# EAGLE board RFMultiOut (EAGLE 7.3.0)
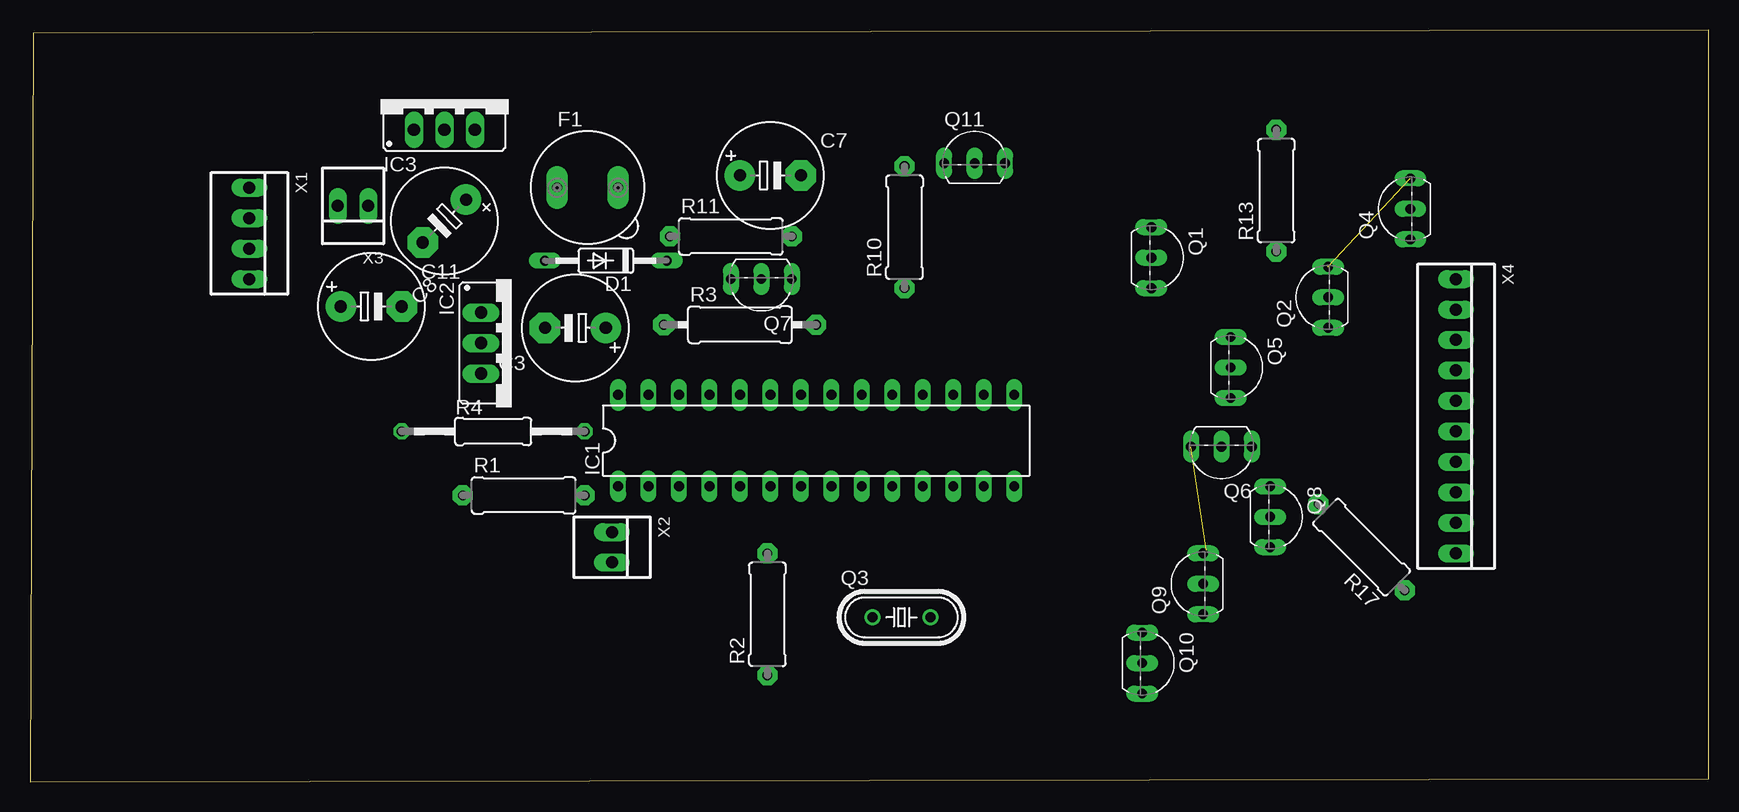
[diagram p0: board, top side]
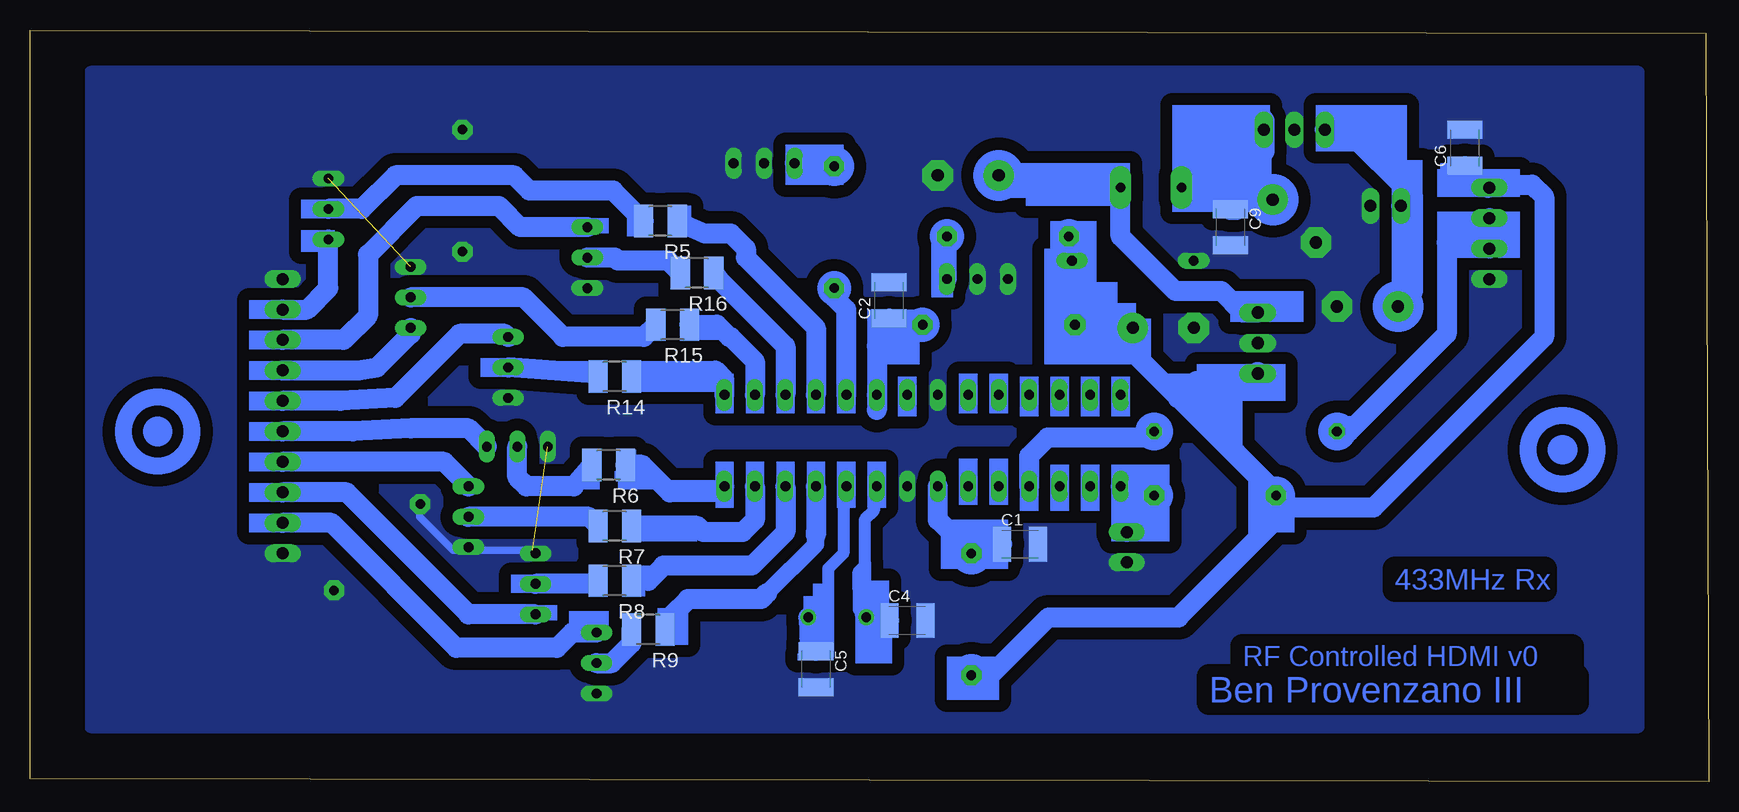
[diagram p1: board, bottom side, seen from below]

Size 139.93 x 62.66 mm. Coordinates in mm from the lower left corner, seen from the top.
Outline: 0,0 139.93,0.25 139.93,62.66 0.25,62.41 0,0
Copper layers (1*16): Top 0.035mm / dielectric 1.5mm / Bottom 0.035mm
Design rules "default": minimum track width 10mil, minimum drill 24mil, track to track 8mil, track to pad 8mil, pad to pad 8mil, via to via 8mil, smd to smd 8mil, copper to edge 40mil, drill to drill 8mil, minimum pad ring 10mil, minimum via ring 8mil, stop-mask expansion 4mil, vias tented up to drill 0mil, thermal gap 10mil

## Footprints (pad centres in the part's own frame; a part is rotated, then mirrored left to right if it is on the bottom)
C1210K = smd 1.5 x 2.9: 1 -1.5,0; 2 1.5,0
E5-8,5 = drill 1.016 pad 2.54: + -2.54,0 | drill 1.016 pad 2.54 octagon: - 2.54,0
DO35-10 = drill 0.813 long: A 5.08,0; C -5.08,0
19560 = drill 0.813 pad 1.778 long: 1 -2.54,0; 2 2.54,0
DIL28-3 = drill 0.813 long: 1 -16.51,-3.81; 2 -13.97,-3.81; 3 -11.43,-3.81; 4 -8.89,-3.81; 5 -6.35,-3.81; 6 -3.81,-3.81; 7 -1.27,-3.81; 8 1.27,-3.81; 9 3.81,-3.81; 10 6.35,-3.81; 11 8.89,-3.81; 12 11.43,-3.81; 13 13.97,-3.81; 14 16.51,-3.81; 15 16.51,3.81; 16 13.97,3.81; 17 11.43,3.81; 18 8.89,3.81; 19 6.35,3.81; 20 3.81,3.81; 21 1.27,3.81; 22 -1.27,3.81; 23 -3.81,3.81; 24 -6.35,3.81; 25 -8.89,3.81; 26 -11.43,3.81; 27 -13.97,3.81; 28 -16.51,3.81
78XXS = drill 1.016 long: GND 0,-2.54; IN -2.54,-2.54; OUT 2.54,-2.54
TO92-EBC = drill 0.813 long: B 0,-1.27; C -2.54,-1.27; E 2.54,-1.27
HC49/S = drill 0.813: 1 -2.413,0; 2 2.413,0
0309/10 = drill 0.8 pad 1.676 octagon: 1 -5.08,0; 2 5.08,0
0309/12 = drill 0.8 pad 1.778 octagon: 1 -6.35,0 | drill 0.8 pad 1.676 octagon: 2 6.35,0
0207/15 = drill 0.813 octagon: 1 -7.62,0; 2 7.62,0
R1210 = smd 1.6 x 2.7: 1 -1.4,0; 2 1.4,0
22-23-2041 = drill 1 long: 1 -3.81,0; 2 -1.27,0; 3 1.27,0; 4 3.81,0
22-23-2021 = drill 1 long: 1 -1.27,0; 2 1.27,0
22-23-2101 = drill 1 long: 1 -11.43,0; 2 -8.89,0; 3 -6.35,0; 4 -3.81,0; 5 -1.27,0; 6 1.27,0; 7 3.81,0; 8 6.35,0; 9 8.89,0; 10 11.43,0

## Placement (x,y rotation side)
C1  .1  [C1210K]  57.4,19.81 0 bottom
C2  .1  [C1210K]  68.33,40.13 90 bottom
C3  47uF  [E5-8,5]  45.47,37.85 180 top
C4  22pF  [C1210K]  66.8,13.46 0 bottom
C5  22pF  [C1210K]  74.42,9.4 270 bottom
C6  .1  [C1210K]  20.32,52.83 90 bottom
C7  47uF  [E5-8,5]  61.72,50.55 0 top
C8  47uF  [E5-8,5]  34.54,46.74 224.6 top
C9  .1  [C1210K]  39.88,46.23 270 bottom
C11  2200uF  [E5-8,5]  28.45,39.62 0 top
D1  TVS_5V  [DO35-10]  48.01,43.43 180 top
F1  1A  [19560]  46.48,49.53 0 top
IC1  ATmega328p  [DIL28-3]  65.53,28.45 0 top
IC2  7805  [78XXS]  40.13,36.58 270 top
IC3  7812  [78XXS]  34.54,56.9 0 top
Q1  BC546  [TO92-EBC]  94.74,43.69 270 top
Q2  BC546  [TO92-EBC]  106.93,40.39 90 top
Q3  16MHz  [HC49/S]  72.64,13.72 0 top
Q4  BC546  [TO92-EBC]  113.79,47.75 90 top
Q5  BC546  [TO92-EBC]  101.35,34.54 270 top
Q6  BC546  [TO92-EBC]  99.31,26.67 180 top
Q7  3LED  [TO92-EBC]  60.96,40.64 180 top
Q8  BC546  [TO92-EBC]  104.65,22.1 270 top
Q9  BC546  [TO92-EBC]  96.52,16.51 90 top
Q10  BC546  [TO92-EBC]  93.98,9.91 270 top
Q11  3LED  [TO92-EBC]  78.74,52.83 0 top
R1  10K  [0309/10]  41.15,23.88 0 top
R2  BEAD  [0309/10]  61.47,13.97 90 top
R3  BEAD  [0309/12]  59.18,38.1 0 top
R4  100  [0207/15]  38.61,29.21 0 top
R5  470  [R1210]  87.38,46.74 180 bottom
R6  470  [R1210]  91.69,26.42 180 bottom
R7  470  [R1210]  91.19,21.34 180 bottom
R8  470  [R1210]  91.19,16.76 180 bottom
R9  470  [R1210]  88.39,12.7 180 bottom
R10  2K7  [0309/10]  72.9,46.23 90 top
R11  2K7  [0309/10]  58.42,45.47 0 top
R13  0  [0309/10]  103.89,49.28 90 top
R14  470  [R1210]  91.19,33.78 180 bottom
R15  470  [R1210]  86.36,38.1 180 bottom
R16  470  [R1210]  84.33,42.42 180 bottom
R17  0  [0309/10]  111,19.56 135 top
X1  RX_MOD  [22-23-2041]  18.29,45.72 270 top
X2  RESET  [22-23-2021]  48.51,19.56 270 top
X3  POWER  [22-23-2021]  26.92,48.01 180 top
X4  22-23-2101  [22-23-2101]  118.87,30.48 270 top

## Library data of the parts
C1-C9 C11 R1-R11 R13-R17 = resistor
D1 = diode
F1 = fuse; MPN: 56000001009; OC_FARNELL: 1185363; OC_NEWARK: 15P8392
IC1 = ic-package
IC2 IC3 = v-reg
Q1 Q2 Q4-Q11 = transistor-npn
Q3 = crystal; OC_FARNELL: 1667008; OC_NEWARK: unknown
X1 = con-molex; MF: MOLEX; MPN: 22-23-2041; OC_FARNELL: 1462920; OC_NEWARK: 38C0355
X2 X3 = con-molex; MF: MOLEX; MPN: 22-23-2021; OC_FARNELL: 1462926; OC_NEWARK: 25C3832
X4 = con-molex; MF: MOLEX; MPN: 22-23-2101; OC_FARNELL: 1756828; OC_NEWARK: 94C0765

## Nets
GND: C1.2 C2.2 C3.- C4.2 C5.2 C6.2 C7.- C8.- C9.2 C11.- D1.A IC1.8 IC1.22 IC2.GND IC3.GND Q1.E Q2.E Q4.E Q5.E Q6.E Q7.B Q7.E Q8.E Q9.E Q10.E Q11.B Q11.E R13.1 R13.2 R17.1 R17.2 X1.4 X2.2 X3.1 X4.1 X4.10
N$1: IC1.14 R6.1
N$2: IC1.1 R1.2 X2.1
N$3: IC1.4 R4.2
N$4: C2.1 IC1.20 R3.2
N$5: R4.1 X1.2 X1.3
N$7: IC1.13 R7.1
N$8: IC1.12 R8.1
N$9: C3.+ C6.1 D1.C IC2.OUT R1.1 R2.1 R3.1 R11.1 X1.1
N$10: IC1.11 R9.1
N$11: IC1.18 R5.1
N$12: Q4.B R5.2
N$13: C4.1 IC1.9 Q3.1
N$14: C5.1 IC1.10 Q3.2
N$15: C7.+ F1.2 IC2.IN
N$16: Q1.C X4.3
N$17: Q10.B R9.2
N$18: IC1.15 R14.1
N$19: IC1.16 R15.1
N$20: IC1.17 R16.1
N$21: Q9.B R8.2
N$22: Q7.C R11.2
N$24: Q8.B R7.2
N$25: C8.+ C9.1 F1.1 IC3.OUT
N$26: Q6.B R6.2
N$27: Q5.B R14.2
N$28: Q2.B R15.2
N$29: Q1.B R16.2
N$30: Q4.C X4.2
N$31: C11.+ IC3.IN X3.2
N$32: Q2.C X4.4
N$33: Q5.C X4.5
N$34: Q6.C X4.6
N$35: C1.1 IC1.7 R2.2
N$36: Q8.C X4.7
N$37: Q9.C X4.8
N$38: Q10.C X4.9
N$40: Q11.C R10.2
N$41: IC1.19 R10.1

## Tracks (layer width: path | path; a pad name or v marks a point on that pad's centre or on a via)
GND  (2 unrouted)
  Bottom 0.61: Q9.E 98.04,19.3 104.65,19.3 107.44,22.1 107.44,23.11
  pour Bottom (isolate 1.016, no thermals): 5.84,59.18 134.87,59.18 134.87,4.57 5.84,4.57
N$1
  Bottom 1.676: IC1.14 82.55,24.13 86.61,24.13 88.9,26.42 R6.1
N$2
  Bottom 1.676: R1.2 46.99,24.64 48.26,24.64 | 48.26,24.64 IC1.1 | X2.1 48.26,21.08 48.26,24.64
N$3
  Bottom 1.676: IC1.4 56.64,27.18 55.12,28.7 46.74,28.7 R4.2
N$4
  Bottom 1.676: 69.34,30.99 IC1.20 69.34,36.32 68.33,37.34 | R3.2 66.29,37.34 68.33,37.34 | 68.33,37.34 C2.1
N$5
  Bottom 1.676: X1.2 X1.3 20.32,45.47 21.34,45.47 21.84,44.96 21.84,37.34 29.97,29.21 R4.1
N$6
  Bottom 1.676: 36.58,24.38 36.58,24.64 39.37,27.43
N$7
  Bottom 1.676: IC1.13 79.5,21.84 80.52,20.83 83.82,20.83 84.33,21.34 R7.1
N$8
  Bottom 1.676: IC1.12 76.96,20.83 79.76,18.03 87.12,18.03 88.39,16.76 R8.1
N$9
  Bottom 1.676: R1.1 44.2,32 49.02,36.83 C3.+ R3.1 52.83,42.42 52.95,42.9 | R1.1 36.07,22.86 | 36.07,22.86 36.07,21.84 44.2,13.72 55.03,13.72 60.66,8.09 | 52.95,42.9 D1.C 53.34,42.42 | 35.56,23.62 35.81,23.88 R1.1 | R11.1 52.95,45.47 52.95,42.9 | C6.1 18.52,49.53 | 18.52,49.53 X1.1 | 18.52,49.53 18.26,49.78 14.73,49.78 13.72,48.77 13.72,37.08 27.94,22.86 36.07,22.86 | 60.66,8.09 R2.1 | 60.66,8.09 60.71,8.04 | 60.71,8.04 60.71,7.87 60.45,7.87 60.45,8.38 60.71,8.64 60.71,8.04
  Bottom 1.778: 42.67,33.27 43.94,32 44.2,32
  Bottom 1.93: IC2.OUT 37.08,33.27 42.67,33.27
N$10
  Bottom 1.016: 74.42,20.57 74.42,19.81
  Bottom 1.422: 78.49,15.75 74.42,19.81 74.42,20.83
  Bottom 1.676: IC1.11 74.42,20.83 74.42,20.57 | 78.49,15.75 78.99,15.24 85.09,15.24 86.48,13.85 R9.1
N$11
  Bottom 1.676: R5.1 83.69,45.72 81.53,45.72 80.26,44.45 80.26,43.69 74.42,37.85 IC1.18
N$12
  Bottom 1.676: R5.2 91.32,49.28 98.3,49.28 99.57,50.55 109.47,50.55 112.27,47.75 Q4.B
N$13
  Bottom 1.016: IC1.9 69.6,24.38 69.6,22.61 70.36,21.84 70.36,18.03 70.87,17.53 70.87,14.35 Q3.1
  Bottom 1.676: 70.36,13.99 C4.1 70.08,11.28 Q3.1
N$14
  Bottom 1.016: IC1.10 72.14,24.64 72.14,19.05 73.41,17.78 73.41,15.37 Q3.2
  Bottom 1.676: Q3.2 74.95,11.33 C5.1
N$15
  Bottom 1.676: IC2.IN 38.86,39.12 40.64,40.89 44.45,40.89 49.02,45.47 F1.2 58.17,49.53 C7.+
N$16
  Bottom 1.676: X4.3 113.79,36.83 111.76,38.86 111.76,43.94 107.7,48.01 100.84,48.01 99.06,46.23 Q1.C
N$17
  Bottom 1.676: Q10.B 91.44,9.91 89.79,11.55 R9.2
N$18
  Bottom 1.676: R14.1 82.8,34.29 82.04,33.53 IC1.15
N$19
  Bottom 1.676: IC1.16 79.5,35.05 81.53,37.08 81.66,37.08 82.67,38.1 R15.1
N$20
  Bottom 1.676: IC1.17 76.96,36.32 82.42,41.78 R16.1
N$21
  Bottom 1.676: R8.2 92.84,16.51 Q9.B
N$22
  Bottom 1.676: Q7.C R11.2
N$24
  Bottom 1.676: R7.2 93.35,22.1 Q8.B
N$25
  Bottom 1.778: 37.34,49.76 C8.+ 37.11,49.53 F1.1 | 37.34,49.76 37.34,55.37 37.08,55.12 IC3.OUT 37.08,52.58 | 37.34,49.76 39.37,47.73 C9.1
N$26
  Bottom 1.676: R6.2 94.62,24.64 98.55,24.64 99.31,25.4 Q6.B
N$27
  Bottom 1.676: R14.2 92.84,34.04 Q5.B
N$28
  Bottom 1.676: R15.2 88.78,37.08 95.5,37.08 98.81,40.39 Q2.B
N$29
  Bottom 1.676: R16.2 86.74,43.43 90.93,43.43 91.19,43.69 Q1.B
N$30
  Bottom 1.676: X4.2 116.84,39.37 115.06,41.15 Q4.C
N$31
  Bottom 1.676: IC3.IN 30.23,54.36 24.64,48.77 24.64,48.01 | C11.+ 24.64,40.89 24.64,48.01 | X3.2 24.64,48.01
N$32
  Bottom 1.676: X4.4 112.52,34.29 111,34.54 108.2,37.34 Q2.C
N$33
  Bottom 1.676: Q5.C 100.33,37.34 104.14,37.34 109.47,32 114.05,31.75 X4.5
N$34
  Bottom 1.676: Q6.C 103.38,29.46 108.2,29.46 113.03,29.21 X4.6
N$35
  Bottom 1.676: C1.1 59.67,19.05 R2.2 64.26,21.84 IC1.7
N$36
  Bottom 1.676: Q8.C 105.41,26.67 X4.7
N$37
  Bottom 1.676: Q9.C 103.38,13.97 113.54,24.13 X4.8
N$38
  Bottom 1.676: Q10.C 94.74,12.45 96.01,11.18 104.39,11.18 114.81,21.59 X4.9
N$40
  Bottom 1.676: Q11.C 75.95,51.31 R10.2
N$41
  Bottom 1.676: IC1.19 71.88,39.37 72.9,40.39 R10.1
(copper drawn outside any net)
  shapes: Bottom area x134, Bottom circle x19

## Text on the board
Bottom: 433MHz Rx | RF Controlled HDMI v0 | Ben Provenzano III